# Altium PCB reader.PcbDoc
Units mm, origin at the board's own origin, x right, y up, seen from the top; angles counter-clockwise.
Board outline 48 x 27 mm, 2 copper layers (Top Layer, Bottom Layer); 64 components, 50 nets, 202 pads, 25 vias.
Unrouted connection lines stored in the file: 37.
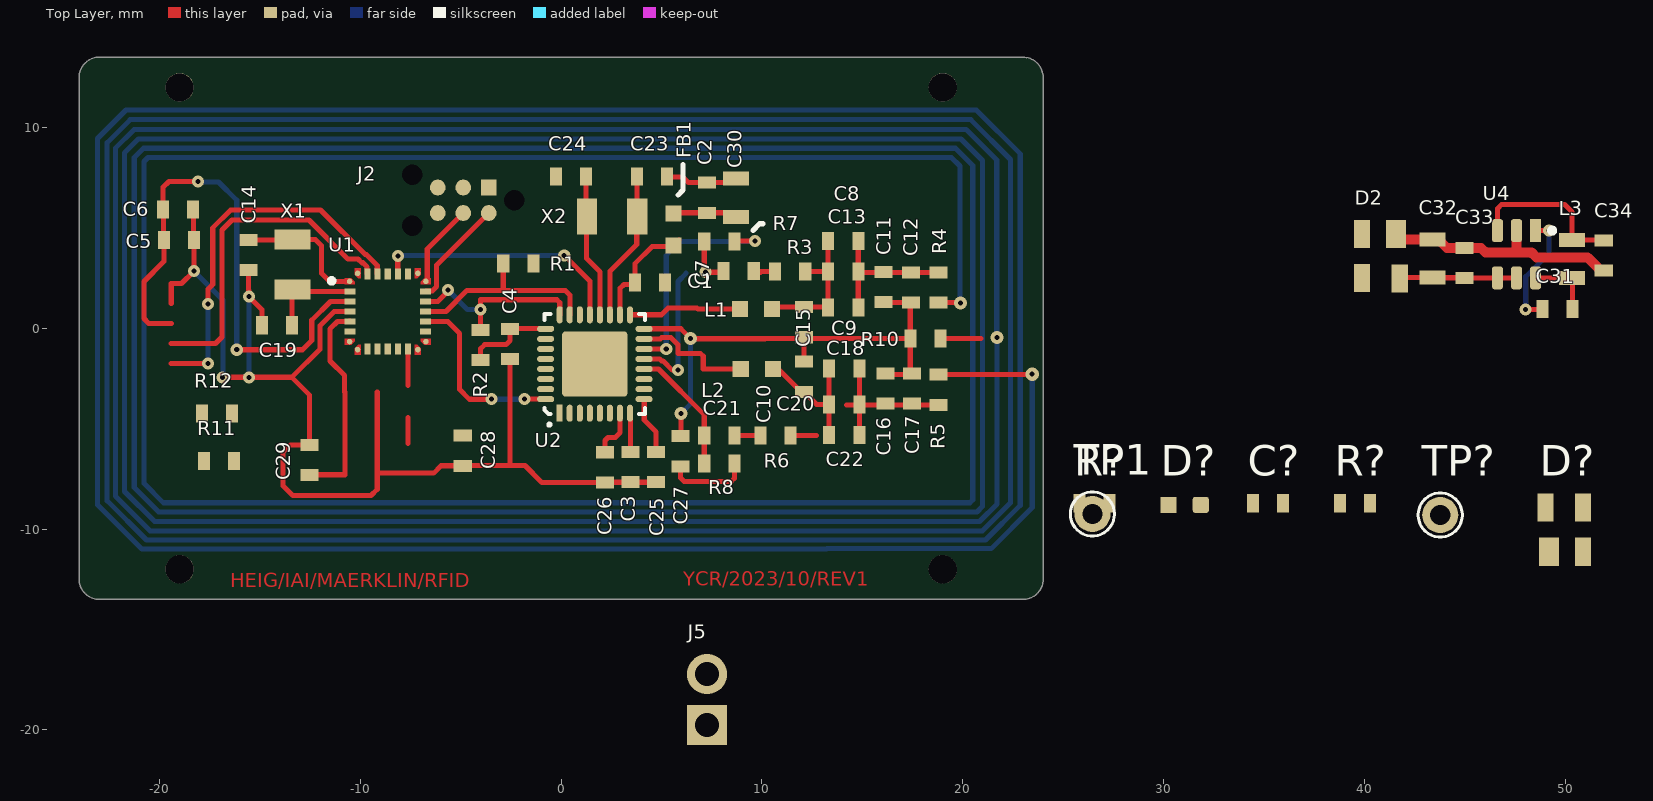
[diagram p0: Top Layer view]
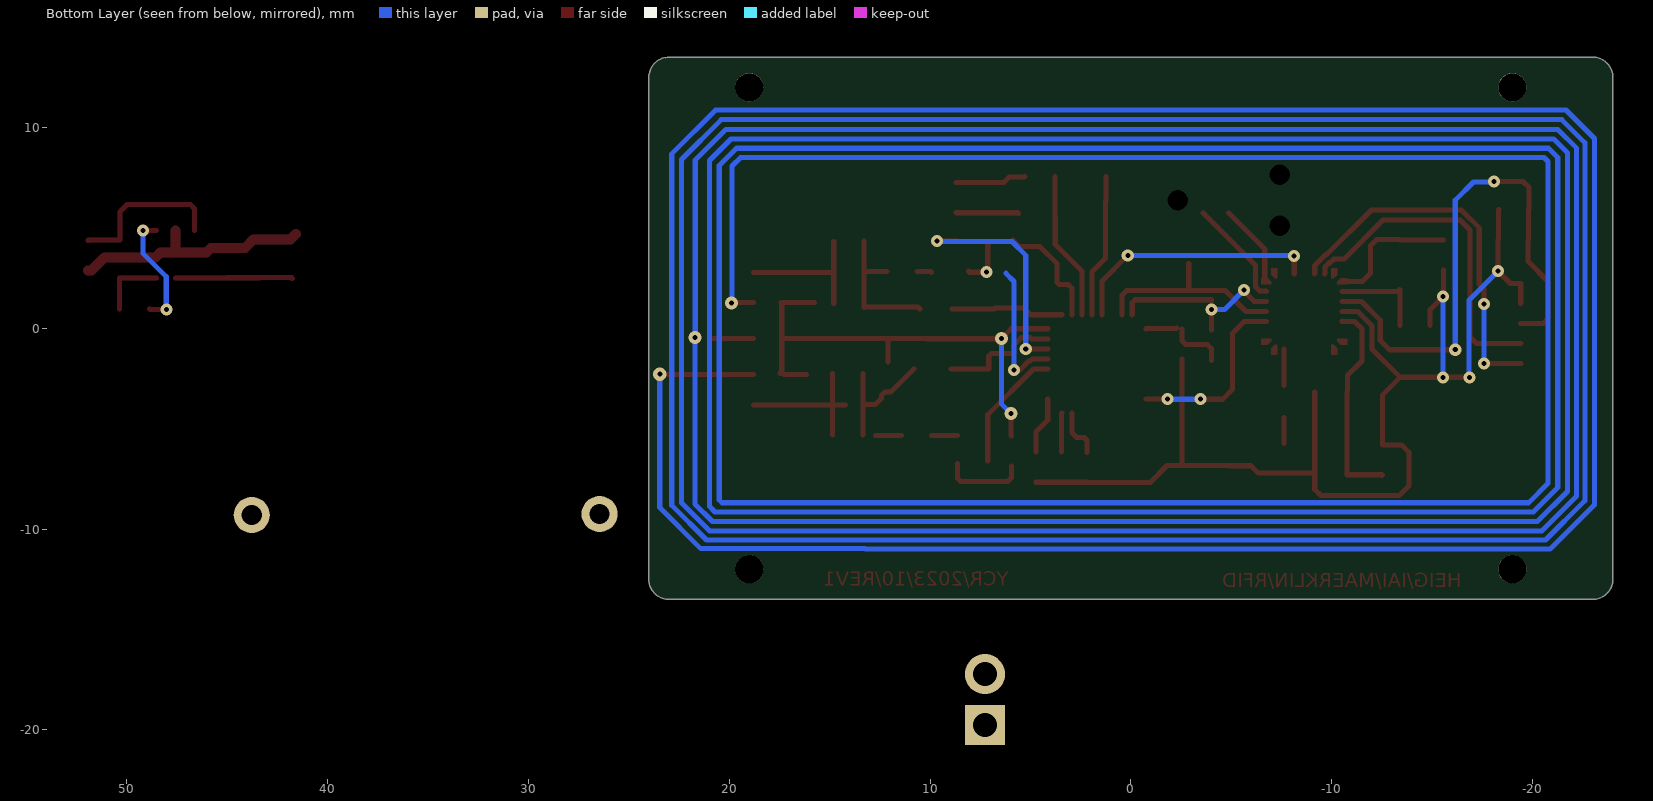
[diagram p1: Bottom Layer view, seen from below]

## Layer stack, top to bottom
Top Solder: solder mask 0.0102, Solder Resist, Dk 3.5
Top Layer: signal copper 0.0356
Dielectric 1: dielectric 0.32, FR-4, Dk 4.8
Bottom Layer: signal copper 0.0356
Bottom Solder: solder mask 0.0102, Solder Resist, Dk 3.5

## Board outline
-23,-13.5 cw(c-23,-12.5) -24,-12.5 -24,12.5 cw(c-23,12.5) -23,13.5 23,13.5 cw(c23,12.5) 24,12.5 24,-12.5 cw(c23,-12.5) 23,-13.5

## Design rules (kind name [scope] priority, off if disabled: settings)
Clearance "Schematic Clearance Constraint" [InNet('Antenna')] p1: gap=0.004 ignorepadtopadclearanceinfootprint=FALSE
Clearance [All] p2: gap=0.15 ignorepadtopadclearanceinfootprint=FALSE
DiffPairsRouting [All] p1: maxlimit=0.254 minlimit=0.254 mostfreqgap=0.254 toplayer_minwidth=0.381 toplayer_maxwidth=0.381 toplayer_prefwidth=0.381 bottomlayer_minwidth=0.381 bottomlayer_maxwidth=0.381 bottomlayer_prefwidth=0.381 maxuncoupledlength=12.7
HoleSize [All] p1: absolutevalues=TRUE maxlimit=2.54 minlimit=0.25 maxpercent=80.000 minpercent=20.000
PolygonConnect [All] p1: thpad.connectstyle=Relief thpad.reliefconductorwidth=0.254 thpad.reliefentries=4 thpad.polygonreliefangle="90 Angle" thpad.airgapwidth=0.254 smdpad.connectstyle=Relief smdpad.reliefconductorwidth=0.254 smdpad.reliefentries=4 smdpad.polygonreliefangle="90 Angle" smdpad.airgapwidth=0.254 via.connectstyle=Direct via.reliefconductorwidth=0.254 via.reliefentries=4 via.polygonreliefangle="90 Angle" via.airgapwidth=0.254
RoutingVias [All] p1: holewidth=0.25 width=0.6 viastyle="Through Hole" minholewidth=0.25 minwidth=0.6 maxholewidth=0.711 maxwidth=1.27
SolderMaskExpansion [All] p1: expansion=0.102 istentingtop=FALSE
Width [All] p1: maxlimit=0.5 minlimit=0.15 preferedwidth=0.254
28 further rules are at their usual default settings.

## Classes and differential pairs
differential pair DSDA: +DSDA_P -DSDA_N
differential pair DSCL: +DSCL_P -DSCL_N

## Components (designator, comment, footprint, x,y, rotation, side; value= is the part's Value field where it differs from the comment)
C1 "100n" SM/C0603 4.42,2.286 r180 top
C2 "100n" SM/C0603 7.264,6.502 r270 top
C3 "100n" SM/C0603 3.454,-6.909 r90 top
C4 "100n" SM/C0603 -2.54,-0.787 r90 top
C5 "4.7u" SM/C0603 -19.037,4.394 r180 top
C6 "100n" SM/C0603 -19.075,5.918 r180 top
C7 "1n" SM/C0603 8.839,2.845 r180 top
C8 "10p" SM/C0603 14.046,4.343 r180 top
C9 "22p" SM/C0603 14.046,1.041 r180 top
C10 "22p" SM/C0603 12.09,0.305 r90 top
C11 "150p" SM/C0603 16.053,2.057 r90 top
C12 "12p" SM/C0603 17.424,2.032 r90 top
C13 "18p" SM/C0603 14.046,2.819 r180 top
C14 "12p" SM/C0603 -15.57,3.646 r90 top
C15 "22p" SM/C0603 12.09,-2.413 r90 top
C16 "150p" SM/C0603 16.154,-2.997 r90 top
C17 "12p" SM/C0603 17.475,-2.997 r90 top
C18 "10p" SM/C0603 14.097,-2.007 r180 top
C19 "12p" SM/C0603 -14.148,0.152 r0 top
C20 "22p" SM/C0603 14.097,-3.785 r180 top
C21 "1n" SM/C0603 7.874,-5.334 r180 top
C22 "18p" SM/C0603 14.097,-5.309 r180 top
C23 "15p" SM/C0603 4.521,7.569 r180 top
C24 "15p" SM/C0603 0.483,7.569 r0 top
C25 "100n" SM/C0603 4.724,-6.909 r90 top
C26 "100n" SM/C0603 2.184,-6.922 r90 top
C27 "100n" SM/C0603 5.944,-6.121 r270 top
C28 "100n" SM/C0603 -4.902,-6.096 r90 top
C29 "100n" SM/C0603 -12.522,-6.553 r270 top
C30 "10u" SM/C0805 8.712,6.502 r270 top
C31 "100n" SM/C0603 49.606,0.965 r180 top
C32 "10u" SM/C0805 43.383,3.48 r270 top
C33 "2.2u" SM/C0603 44.983,3.251 r270 top
C34 "10u" SM/C0603 51.918,3.632 r90 top
C? "100n" SM/C0603 35.191,-8.713 r0 top
D2 "BAS4002ARPPE6327HTSA1" SOT143-4 41.58,4.699 r180 top
D? "BAS4002ARPPE6327HTSA1" SOT143-4 49.186,-11.126 r0 top
D? "LED" SM/LED0603 31.05,-8.789 r0 top value=150060SS75000
FB1 "250@1MHz" SM/L0603 5.588,4.915 r270 top value=MI0603L301R-10
J2 "TagConnect SW" TC2030-IDC-NL -4.877,6.375 r180 top
J5 "Train Switch" CONN/PIN2 7.264,-19.761 r90 top
L1 "1u" SM/L0603 9.703,0.965 r180 top
L2 "1u" SM/L0603 9.742,-2.032 r180 top
L3 "3.3u" SM/L0805 50.343,3.454 r270 top
R1 "3.3k" SM/R0603 -2.134,3.226 r0 top
R2 "3.3k" SM/R0603 -4.013,-0.838 r270 top
R3 "15k" SM/R0603 11.405,2.819 r180 top
R4 "4.7" SM/R0603 18.796,2.032 r90 top
R5 "4.7" SM/R0603 18.796,-3.06 r270 top
R6 "15k" SM/R0603 10.668,-5.334 r180 top
R7 "15k" SM/R0603 7.874,4.318 r180 top
R8 "15k" SM/R0603 7.874,-6.731 r180 top
R10 "0" SM/R0603 18.136,-0.508 r180 top
R11 "1k" SM/R0603 -17.043,-6.604 r180 top
R12 "1k" SM/R0603 -17.145,-4.242 r0 top
R? "460" SM/R0603 26.555,-8.713 r0 top
R? "1k" SM/R0603 39.534,-8.713 r0 top
TP1 "TP" TP 26.453,-9.246 r90 top
TP? "Occupancy" TP 43.776,-9.297 r90 top
U1 "STM32G071" FP-UFQFPN28-A0B0-MFG -8.636,0.838 r0 top
U2 "CLRC663" QFN50P500X500X100-33N 1.676,-1.778 r90 top
U4 "LMR50410Y3FQDBVRQ1" SOT23-6 47.574,3.69 r270 top
X1 "8M" RT3215-32.768-12.5 -13.386,3.175 r90 top value=RT3215-32.768-12.5
X2 "27.12M" RT3215-32.768-12.5 2.54,5.563 r0 top value=RT3215-32.768-12.5

## Footprints (in the part's own frame and the unit in brackets; to place one, negate y for a bottom-side part, rotate by r counter-clockwise, add the part's x,y. Pads: shape width x height; smd on the part's side, far side on the other; paste and mask are expansions set on the pad)
CONN/PIN2 [mm]
  rect 2x2 hole 1.2 unplated: 1(0,0)
  round 2 hole 1.2 unplated: 2(2.54,0)
FP-UFQFPN28-A0B0-MFG [mm]
  round 0.27 smd paste+0 mask+0: 1(-1.9,1.5) 7(-1.9,-1.5) 8(-1.5,-1.9) 14(1.5,-1.9) 15(1.9,-1.5) 21(1.9,1.5) 22(1.5,1.9) 28(-1.5,1.9)
  rect 0.55x0.3 smd paste+0 mask+0: 2(-1.875,1) 3(-1.875,0.5) 4(-1.875,0) 5(-1.875,-0.5) 6(-1.875,-1) 16(1.875,-1) 17(1.875,-0.5) 18(1.875,0) 19(1.875,0.5) 20(1.875,1)
  rect 0.3x0.55 smd paste+0 mask+0: 9(-1,-1.875) 10(-0.5,-1.875) 11(0,-1.875) 12(0.5,-1.875) 13(1,-1.875) 23(1,1.875) 24(0.5,1.875) 25(0,1.875) 26(-0.5,1.875) 27(-1,1.875)
  Top Layer region: -1.35,1.65 -1.48,1.65 -1.65,1.82 -1.65,2.15 -1.35,2.15 -1.35,1.65
  Top Layer region: 1.35,1.65 1.48,1.65 1.65,1.82 1.65,2.15 1.35,2.15 1.35,1.65
  Top Layer region: 1.35,-1.65 1.48,-1.65 1.65,-1.82 1.65,-2.15 1.35,-2.15 1.35,-1.65
  Top Layer region: -1.35,-1.65 -1.48,-1.65 -1.65,-1.82 -1.65,-2.15 -1.35,-2.15 -1.35,-1.65
  Top Layer region: -1.65,1.35 -1.65,1.48 -1.82,1.65 -2.15,1.65 -2.15,1.35 -1.65,1.35
  Top Layer region: 1.65,1.35 1.65,1.48 1.82,1.65 2.15,1.65 2.15,1.35 1.65,1.35
  Top Layer region: 1.65,-1.35 1.65,-1.48 1.82,-1.65 2.15,-1.65 2.15,-1.35 1.65,-1.35
  Top Layer region: -1.65,-1.35 -1.65,-1.48 -1.82,-1.65 -2.15,-1.65 -2.15,-1.35 -1.65,-1.35
  silkscreen extent -2.91,1.41 -2.68,1.64, body extent -2.25,-2.25 2.25,2.25, height 0.25
QFN50P500X500X100-33N [mm]
  rect 0.85x0.3 smd: 1(-2.45,1.75)
  oval 0.85x0.3 smd: 2(-2.45,1.25) 3(-2.45,0.75) 4(-2.45,0.25) 5(-2.45,-0.25) 6(-2.45,-0.75) 7(-2.45,-1.25) 8(-2.45,-1.75) 17(2.45,-1.75) 18(2.45,-1.25) 19(2.45,-0.75) 20(2.45,-0.25) 21(2.45,0.25) 22(2.45,0.75) 23(2.45,1.25) 24(2.45,1.75)
  oval 0.3x0.85 smd: 9(-1.75,-2.45) 10(-1.25,-2.45) 11(-0.75,-2.45) 12(-0.25,-2.45) 13(0.25,-2.45) 14(0.75,-2.45) 15(1.25,-2.45) 16(1.75,-2.45) 25(1.75,2.45) 26(1.25,2.45) 27(0.75,2.45) 28(0.25,2.45) 29(-0.25,2.45) 30(-0.75,2.45) 31(-1.25,2.45) 32(-1.75,2.45)
  rrect10% 3.25x3.25 smd: 33(0,0)
  silkscreen extent -3.07,-2.5 2.5,2.5, body extent -2.48,-2.53 2.53,2.47, height 0.9
RT3215-32.768-12.5 [mm]
  rect 1x1.8 smd: 1(-1.25,0) 2(1.25,0)
  body extent -1.61,-0.76 1.61,0.76, height 0.9
SM/C0603 [mm] "Chip Capacitor, Body 1.6x0.8mm, IPC Low Density"
  rect 0.6x0.9 smd: 1(-0.75,0) 2(0.75,0)
  body extent -0.83,-0.4 0.77,0.4, height 0.6
SM/C0805 [mm] "Chip Resistor, Body 2.0x1.3mm, IPC Low Density"
  rect 0.7x1.3 smd: 1(-0.95,0) 2(0.95,0)
  body extent -1,-0.59 1,0.61, height 1.2
SM/L0603 [mm] "Chip Capacitor, Body 1.6x0.8mm, IPC Low Density"
  rect 0.8x0.8 smd: 1(-0.8,0) 2(0.8,0)
  body extent -0.77,-0.39 0.83,0.41, height 0.45
SM/L0805 [mm] "Chip Resistor, Body 2.0x1.3mm, IPC Low Density"
  rect 0.7x1.3 smd: 1(-0.95,0) 2(0.95,0)
  body extent -1.13,-0.71 1.07,0.74, height 0.87
SM/LED0603 [mm] "Chip Capacitor, Body 1.6x0.8mm, IPC Low Density"
  rect 0.8x0.8 smd: 1(-0.8,0)
  rrect30% 0.8x0.8 smd: 2(0.8,0)
  body extent -0.78,-0.4 0.84,0.4, height 0.73
SM/R0603 [mm] "Chip Resistor, Body 1.6x0.8mm, IPC Low Density"
  rect 0.6x0.9 smd: 1(-0.75,0) 2(0.75,0)
  body extent -0.8,-0.4 0.8,0.4, height 0.4
SOT23-6 [mm] "SOT23, 6-Leads, Body 3.1x3.2mm (max), Pitch 0.95mm, IPC Medium Density"
  rect 1.15x0.55 smd: 1(-1.175,0.95)
  rrect50% 1.15x0.55 smd: 2(-1.175,0) 3(-1.175,-0.95) 4(1.175,-0.95) 5(1.175,0) 6(1.175,0.95)
  silkscreen extent -1.3,1.65 -1.05,1.9, body extent -1.5,-1.5 1.5,1.5, height 1.3
SOT143-4 [mm]
  rect 1x1.4 smd: 1(0,0)
  rect 0.8x1.4 smd: 2(1.7,0) 3(1.7,2.2) 4(-0.178,2.21)
  body extent -0.7,-0.12 2.22,2.3, height 1
TC2030-IDC-NL [mm] "TagConnect"
  round 0 hole 1 unplated: 0(-2.54,0) 0(2.54,-1.27) 0(2.54,1.27)
  rect 0.787x0.787 smd paste-2539.97: 1(-1.27,-0.635)
  round 0.787 smd paste-2539.97: 2(-1.27,0.635) 3(0,-0.635) 4(0,0.635) 5(1.27,-0.635) 6(1.27,0.635)
TP [mm]
  round 1.8 hole 1: 1(0,0)
  silkscreen extent -1.1,-1.1 1.1,1.1

## Part data
C1 C2 C3 C4 C5 C6 C7 C8 C9 C10 C11 C12 C13 C14 C15 C16 C17 C18 C19 C20 C21 C22 C23 C24 C25 C26 C27 C28 C29 C30 C31 C32 C33 C34 C?: library part C, "Chip Capacitor", Dielectric=X7R, Voltage=16V
D2 D?: "Bridge Rectifier Single Phase Schottky 40 V Surface Mount PG-SOT-143-3D"
D?: Supplier Part Number 1=732-4979-1-ND, Supplier 1=Digi-Key
FB1: library part FB0603, Supplier Part Number 1=240-2374-1-ND, Supplier 1=Digi-Key
J2: library part "CONN 6 / TagConnect"
J5: library part "CONN 2 Socket"
L1 L2 L3: library part L
R1 R2 R3 R4 R5 R6 R7 R8 R10 R11 R12 R? R?: library part R, "Chip Resistor SMD"
TP1: "Test Point"
TP?: library part TP, "Test Point"
U1: Supplier Part Number 1=497-18343-ND, Supplier 1=Digi-Key
U2: Supplier Part Number 1=568-13592-ND, Supplier 1=Digi-Key
U4: library part LMR50410-Q1, "Buck Switching Regulator IC Positive Fixed 3.3V 1 Output 1A SOT-23-6", Supplier Part Number 1=296-LMR50410Y3FQDBVRQ1CT-ND, Supplier 1=Digi-Key
X1 X2: library part XTAL, Supplier Part Number 1=2151-RT3215-32.768-12.5-TRCT-ND, Supplier 1=Digi-Key

## Free pads (board coordinates)
  round 1.4 hole 1.4: 1(-19,-12) 1(-19,12) 1(19,-12) 1(19,12)

## Via types
v1: diameter 0.6, hole 0.25, Top Layer to Bottom Layer, 20 vias
v2: diameter 0.65, hole 0.25, Top Layer to Bottom Layer, 5 vias

## Nets (pads, with @x,y where several pads share a name; then routed paths per layer and width w, separated by ;. In a path a pad name is that pad's centre, name@x,y a point inside that pad or via, vN(x,y) a via of type N, cw(c..) or ccw(c..) an arc to the next point about the centre after c; other vN are vias at no path point)
+3.3V: C3.2 C4.2 C5.2 C6.2 C28.2 C34.2 D?.1@30.25,-8.789 J2.1 L3.1 R1.2 R2.2 R12.2 U1.3 U2.8 U2.25 U4.3 | length 41.6
  Top Layer w0.254: -19.414,0.24 -20.535,0.24 -20.777,0.483 -20.777,2.337 -19.787,3.327 C5.2 -19.806,4.414 -19.806,5.899 C6.2 -19.825,7.022 -19.533,7.315 v1(-18.085,7.315) ; v1(-16.154,-1.067) -12.878,-1.067 -12.421,-0.61 -12.421,0.406 -11.489,1.338 U1.3 ; R2.2 -4.013,-1.016 -3.81,-0.813 -2.743,-0.813 -2.54,-0.61 C4.2 ; C4.2@-2.286,0.012 -2.259,-0.015 -0.771,-0.015 U2.25@-0.762,-0.024 ; U2.8@3.438,-4.224 3.447,-4.233 3.447,-5.467 3.454,-5.474 C3.2 ; U4.3 46.624,5.959 46.838,6.172 49.962,6.172 50.343,5.791 L3.1 50.354,4.393 51.907,4.393 C34.2
  Bottom Layer w0.254: v1(-18.085,7.315) -18.059,7.29 -17.069,7.29 -16.154,6.375 v1(-16.154,-1.067)
Antenna: R4.1 R5.1 R10.1 | length 744.9
  Top Layer w0.254: R10.1@18.784,-0.508 20.904,-0.508 ; R5.1 18.808,-2.298 23.229,-2.298 v2@23.241,-2.286 ; R4.1 18.802,1.276 19.882,1.276 v2(19.888,1.27)
  Bottom Layer w0.254: v2(19.888,1.27) 19.863,1.295 19.863,8.077 19.431,8.509 -20.574,8.509 -20.777,8.306 -20.777,-7.722 -19.812,-8.687 20.349,-8.687 20.498,-8.538 20.498,8.103 19.634,8.966 -20.803,8.966 -21.26,8.509 -21.26,-7.925 -20.041,-9.144 20.701,-9.144 20.98,-8.865 20.98,8.357 19.914,9.423 -21.057,9.423 -21.742,8.738 -21.742,-8.128 -20.244,-9.627 20.828,-9.627 21.71,-8.745 v2(21.71,-0.447) ; v2@21.692,-0.447 21.692,8.382 20.168,9.906 -21.26,9.906 -22.2,8.966 -22.2,-8.357 -20.472,-10.084 20.98,-10.084 22.377,-8.687 22.377,8.407 20.396,10.389 -21.463,10.389 -22.606,9.246 -22.606,-8.585 -20.65,-10.541 21.133,-10.541 22.86,-8.814 22.86,8.687 20.676,10.871 -21.666,10.871 -23.089,9.449 -23.089,-8.788 -20.879,-10.998 13.208,-10.998 13.233,-10.973 21.412,-10.973 23.458,-8.927 v2(23.458,-2.287)
DSCL_N: 
DSCL_P: 
DSDA_N: 
DSDA_P: 
GND: C1.1 C2.1 C3.1 C4.1 C5.1 C6.1 C10.1 C11.1 C12.1 C14.1 C15.2 C16.2 C17.2 C19.1 C23.1 C24.1 C25.1 C26.1 C27.1 C28.1 C29.1 C30.1 C32.1 C33.1 C34.1 C?.2 D2.1 D?.1@49.186,-11.126 J2.5 J5.2 R10.2 R?.2@40.284,-8.713 U1.4 U2.16 U2.33 U4.2 | length 104.8
  Top Layer w0.254: -19.414,1.24 -19.414,2.227 -18.906,2.227 v1(-18.288,2.845) -18.287,2.846 C5.1 -18.306,4.414 -18.306,5.899 C6.1 ; v1(-16.866,-2.438) v1(-15.545,-2.438) -13.411,-2.438 ; C14.1 -15.57,1.905 -15.545,1.88 v1(-15.545,1.575) -14.898,0.928 C19.1 ; U1.4 -11.303,0.838 -12.014,0.127 -12.014,-1.041 -13.411,-2.438 ; -9.157,-3.182 -9.157,-7.282 ; C4.1 -2.54,-6.833 ; U2.16@4.138,-0.024 5.954,-0.024 6.449,-0.52 10.16,-0.52 10.172,-0.508 C10.1@12.09,-0.508 ; C25.1 4.718,-7.666 2.191,-7.666 C26.1 -0.964,-7.672 -1.803,-6.833 -2.54,-6.833 ; C23.1 5.297,7.544 6.045,7.544 6.337,7.252 C2.1 C30.1@8.712,7.252 ; C27.1 5.969,-5.346 v2(5.969,-4.242) ; C15.2 C10.1@12.09,-0.508 ; C11.1@15.748,1.282 C12.1@17.272,1.282 ; C16.2@16.154,-2.298 C17.2@17.272,-2.298 ; R10.2@17.272,-0.508 C10.1@12.09,-0.508 ; C12.1 17.386,1.243 R10.2 17.386,-2.158 C17.2 ; -13.411,-2.438 -12.522,-3.327 C29.1 -13.474,-5.803 -13.843,-6.172 -13.843,-7.849 -13.36,-8.331 -9.474,-8.331 -9.157,-8.014 -9.157,-7.282 ; -9.157,-7.282 -9.088,-7.214 -6.35,-7.214 -5.982,-6.846 C28.1 -4.889,-6.833 -2.54,-6.833
  Top Layer w0.5: D2.1 41.859,4.42 43.373,4.42 C32.1 43.683,4.43 44.112,4.001 45.808,4.001 46.025,3.785 48.311,3.785 48.565,3.531 51.119,3.531 51.768,2.882 C34.1 ; 47.574,3.785 U4.2
  Bottom Layer w0.254: v1(-18.288,2.845) -16.84,1.397 -16.84,-2.413 v1(-16.866,-2.438) ; v1(-15.545,-2.438) v1(-15.545,1.575) ; v2(5.969,-4.242) 6.449,-3.761 v2(6.449,-0.508)
IRQ: U1.15 U2.32 | length 9.2
  Top Layer w0.254: -6.761,0.338 -5.647,0.338 -5.055,-0.254 -5.055,-3.048 -4.572,-3.531 v1(-3.48,-3.531) ; v1(-1.829,-3.531) -1.822,-3.524 U2.32@-0.762,-3.524
  Bottom Layer w0.254: v1(-3.48,-3.531) v1(-1.829,-3.531)
LED: R?.1@25.805,-8.713 U1.13 | length 1.8
  Top Layer w0.254: U1.13 -7.636,-2.829 -7.62,-2.845
NetC2_2: C2.2 C30.2 FB1.1 | length 3.1
  Top Layer w0.254: FB1.1 5.625,5.752 C2.2 C30.2@8.712,5.752
NetC7_1: C7.1 R3.2 | length 0.7
  Top Layer w0.254: 9.918,2.794 9.943,2.819 R3.2
NetC7_2: C7.2 R7.2 U2.13 | length 9.4
  Top Layer w0.254: U2.13@4.138,-1.524 4.899,-1.524 4.993,-1.618 5.073,-1.618 5.537,-2.083 v1(5.817,-2.083) ; v1@7.124,2.794 R7.2 ; v1(7.188,2.794) 8.038,2.794 C7.2
  Bottom Layer w0.254: v1(5.817,-2.083) 5.817,2.337 6.223,2.743
NetC8_1: C8.1 C9.1 C11.2 C12.2 C13.1 R4.2 | length 7.1
  Top Layer w0.254: C9.1@14.796,1.226 C13.1@14.796,2.782 ; C8.1@14.796,4.31 C13.1@14.796,2.782 ; R4.2 17.272,2.782 15.748,2.782 C13.1@14.796,2.782
NetC8_2: C8.2 C9.2 C10.2 C13.2 L1.1 R3.1 | length 7.3
  Top Layer w0.254: L1.1 10.593,1.055 C10.2 13.283,1.055 C9.2 C13.2 ; R3.1 C13.2 ; C8.2 C13.2
NetC14_2: C14.2 U1.1 X1.2 | length 6.7
  Top Layer w0.254: C14.2 -13.415,4.396 X1.2 -12.248,4.425 -11.938,4.115 -11.938,2.743 -11.533,2.338 U1.1@-10.586,2.338
NetC15_1: C15.1 C18.2 C20.2 C22.2 L2.1 R6.1 | length 7.7
  Top Layer w0.254: L2.1@10.809,-2.032 11.94,-3.163 C15.1 12.24,-3.163 12.413,-3.336 12.413,-3.486 12.712,-3.785 C20.2 ; R6.1 12.712,-5.334 ; C22.2 C20.2 ; C18.2@13.347,-2.261 C20.2
NetC16_1: C16.1 C17.1 C18.1 C20.1 C22.1 R5.2 | length 7.6
  Top Layer w0.254: 14.212,-3.81 15.748,-3.81 17.272,-3.81 R5.2 ; C22.1 C20.1 C18.1@14.847,-2.261
NetC19_2: C19.2 U1.2 X1.1 | length 4.7
  Top Layer w0.254: C19.2 -13.398,1.913 X1.1 -13.299,1.838 U1.2
NetC21_1: C21.1 R6.2 | length 1.3
  Top Layer w0.254: C21.1 R6.2
NetC21_2: C21.2 R8.2 U2.12 | length 6.2
  Top Layer w0.254: U2.12@4.138,-2.024 4.843,-2.024 7.124,-4.305 C21.2 R8.2@7.124,-6.604
NetC23_2: C23.2 U2.19 X2.2 | length 7.4
  Top Layer w0.254: U2.19@2.438,0.676 2.438,2.844 3.765,4.171 3.765,5.556 3.771,5.563 C23.2
NetC24_2: C24.2 U2.20 X2.1 | length 7.2
  Top Layer w0.254: C24.2 1.233,6.375 1.258,6.35 1.258,4.629 1.265,4.623 1.265,3.485 1.938,2.812 U2.20@1.938,0.676
NetC25_2: C25.2 U2.9 | length 2.9
  Top Layer w0.254: U2.9@4.138,-3.524 4.138,-4.57 4.724,-5.156 C25.2
NetC26_2: C26.2 U2.7 | length 2.5
  Top Layer w0.254: C26.2 2.184,-5.584 2.333,-5.436 2.692,-5.436 2.938,-5.19 U2.7@2.938,-4.224
NetC27_2: C27.2 R7.1 R8.1 U2.14 | length 15.7
  Top Layer w0.254: U2.14@4.138,-1.024 5.19,-1.024 5.207,-1.041 v1(5.232,-1.041) ; C27.2 5.944,-7.442 6.121,-7.62 8.475,-7.62 8.624,-7.471 R8.1 ; R7.1 8.649,4.343 v1(9.652,4.343)
  Bottom Layer w0.254: v1(5.232,-1.041) 5.232,3.632 5.918,4.318 9.627,4.318 v1(9.652,4.343)
NetC31_1: C31.1 L3.2 U4.6 | length 3.4
  Top Layer w0.254: U4.6 48.534,2.504 L3.2 50.356,2.491 C31.1
NetC31_2: C31.2 U4.1 | length 5.9
  Top Layer w0.254: v1(48.031,0.94) 48.831,0.94 C31.2 ; U4.1 49.188,4.865 v1(49.2,4.877)
  Bottom Layer w0.254: v1(48.031,0.94) 48.031,2.565 49.2,3.734 v1(49.2,4.877)
NetC32_2: C32.2 C33.2 D2.4 U4.4 U4.5 | length 5.9
  Top Layer w0.254: D2.4 41.798,2.53 C32.2 43.398,2.515 44.969,2.515 C33.2 47.561,2.501 U4.5
NetC?_1: C?.1 R11.1 R?.1@38.784,-8.713 TP?.1 U1.7
NetD2_2: D2.2 D?.2@50.886,-11.126
NetD2_3: D2.3
NetD?_2: D?.2@31.851,-8.789 R?.2@27.305,-8.713
NetD?_3: D?.3
NetD?_4: D?.4 R11.2
NetJ2_2: J2.2 U1.20 | length 5.4
  Top Layer w0.254: U1.20 -6.738,1.861 -6.421,1.861 -6.209,2.073 -6.209,3.138 -4.763,4.584 J2.2
NetJ2_4: J2.4 U1.21 | length 4.2
  Top Layer w0.254: U1.21@-6.686,2.338 -6.672,2.338 -6.67,2.34 -6.67,3.947 J2.4
NetJ5_1: J5.1 R12.1 U1.22
NetL1_2: L1.2 U2.17 | length 5.6
  Top Layer w0.254: U2.17@3.438,0.676 4.994,0.676 5.334,1.016 6.756,1.016 6.807,0.965 L1.2
NetL2_2: L2.2 U2.15 | length 6.1
  Top Layer w0.254: U2.15@4.138,-0.524 4.934,-0.524 4.993,-0.464 5.471,-0.464 5.809,-0.802 5.809,-1.237 5.817,-1.245 6.925,-1.245 7.074,-1.393 7.074,-2.032 L2.2
NetP1_1: 
NetP2_2: 
NetP5_1: 
NetR1_1: R1.1 U1.18 U2.23 | length 10
  Top Layer w0.254: U1.18 -5.74,0.838 -4.699,1.88 -2.884,1.88 ; R1.1 -2.884,1.88 ; U2.23@0.438,0.676 0.438,1.645 0.203,1.88 -2.884,1.88
NetR2_1: R2.1 U1.19 U2.24 | length 9.5
  Top Layer w0.254: U1.19 -6.143,1.338 -5.639,1.843 v1(-5.639,1.905) ; R2.1 v1(-4.013,0.94) -4.013,1.422 -0.22,1.422 -0.071,1.274 -0.071,0.685 U2.24@-0.062,0.676
  Bottom Layer w0.254: v1(-5.639,1.905) -4.674,0.94 v1(-4.013,0.94)
NetU1_6: U1.6
NetU1_26: U1.26 | length 18.8
  Top Layer w0.254: -19.414,-1.76 -17.584,-1.76 v1(-17.577,-1.753) ; v1(-17.577,1.219) -17.577,1.956 -17.348,2.184 -17.348,5.004 -16.459,5.893 -11.983,5.893 -9.759,3.669 -9.704,3.669 -9.159,3.124 -9.159,2.736 U1.26
  Bottom Layer w0.254: v1(-17.577,-1.753) v1(-17.577,1.219)
NetU1_27: U1.27 | length 16.7
  Top Layer w0.254: -19.414,-0.76 -17.219,-0.76 -16.891,-0.432 -16.891,4.89 -16.387,5.394 -12.563,5.394 -10.623,3.454 -10.116,3.454 -9.926,3.265 -9.871,3.265 -9.659,3.053 -9.659,2.736 U1.27
nRST: C29.2 J2.3 TP1.1 U1.5 | length 10.5
  Top Layer w0.254: C29.2@-12.508,-7.318 C29.2 -12.512,-7.293 -10.767,-7.293 -10.757,-7.282 -10.757,-3.182 -10.78,-3.159 -10.78,-2.351 -11.506,-1.626 -11.506,-0.025 -11.143,0.338 U1.5 U1.5@-10.526,0.353
PDOWN: U1.14 U2.21 | length 12.7
  Top Layer w0.254: -8.136,2.713 v1(-8.136,3.593) ; v1(0.152,3.632) 1.438,2.347 U2.21@1.438,0.676
  Bottom Layer w0.254: v1(-8.136,3.593) -8.097,3.632 v1(0.152,3.632)
TVDD: C1.2 FB1.2 U2.18 | length 5.8
  Top Layer w0.254: U2.18@2.938,0.676 2.938,1.998 3.124,2.184 3.568,2.184 C1.2 3.67,3.212 4.521,4.064 5.537,4.064 FB1.2 FB1.2@5.861,4.388
pads on no net: J2.0 J2.6 U1.8 U1.9 U1.10 U1.11 U1.12 U1.16 U1.17 U1.23 U1.24 U1.25 U1.28 U2.1 U2.2 U2.3 U2.4 U2.5 U2.6 U2.10 U2.11 U2.22 U2.26 U2.27 U2.28 U2.29 U2.30 U2.31
copper on no net: | length 1.3
  Top Layer w0.254: -7.62,-5.727 -7.62,-4.445

## Other copper
Top Layer:
  text "YCR/2023/10/REV1" at 6.068,-12.829 h0.7
  text "HEIG/IAI/MAERKLIN/RFID" at -16.487,-12.906 h0.7

## Silkscreen, mask and mechanical layers (free items; w line width, h text height)
Top Overlay:
  lines w0.254: 5.817,6.629 6.071,6.883 6.071,8.153 ; 9.55,4.877 9.881,5.207 10.058,5.207
Top Solder:
  text "YCR/2023/10/REV1" at 6.067,-12.841 h0.7
  text "HEIG/IAI/MAERKLIN/RFID" at -16.488,-12.917 h0.7
Mechanical 1:
  the board outline again, w0.254

## Dimensions
-24,-13.5 to -24,13.5 on Mechanical 7
-24,13.5 to 24,13.5 on Mechanical 7